# EAGLE board synth_revC (EAGLE 7.5.0), part 1 of 2
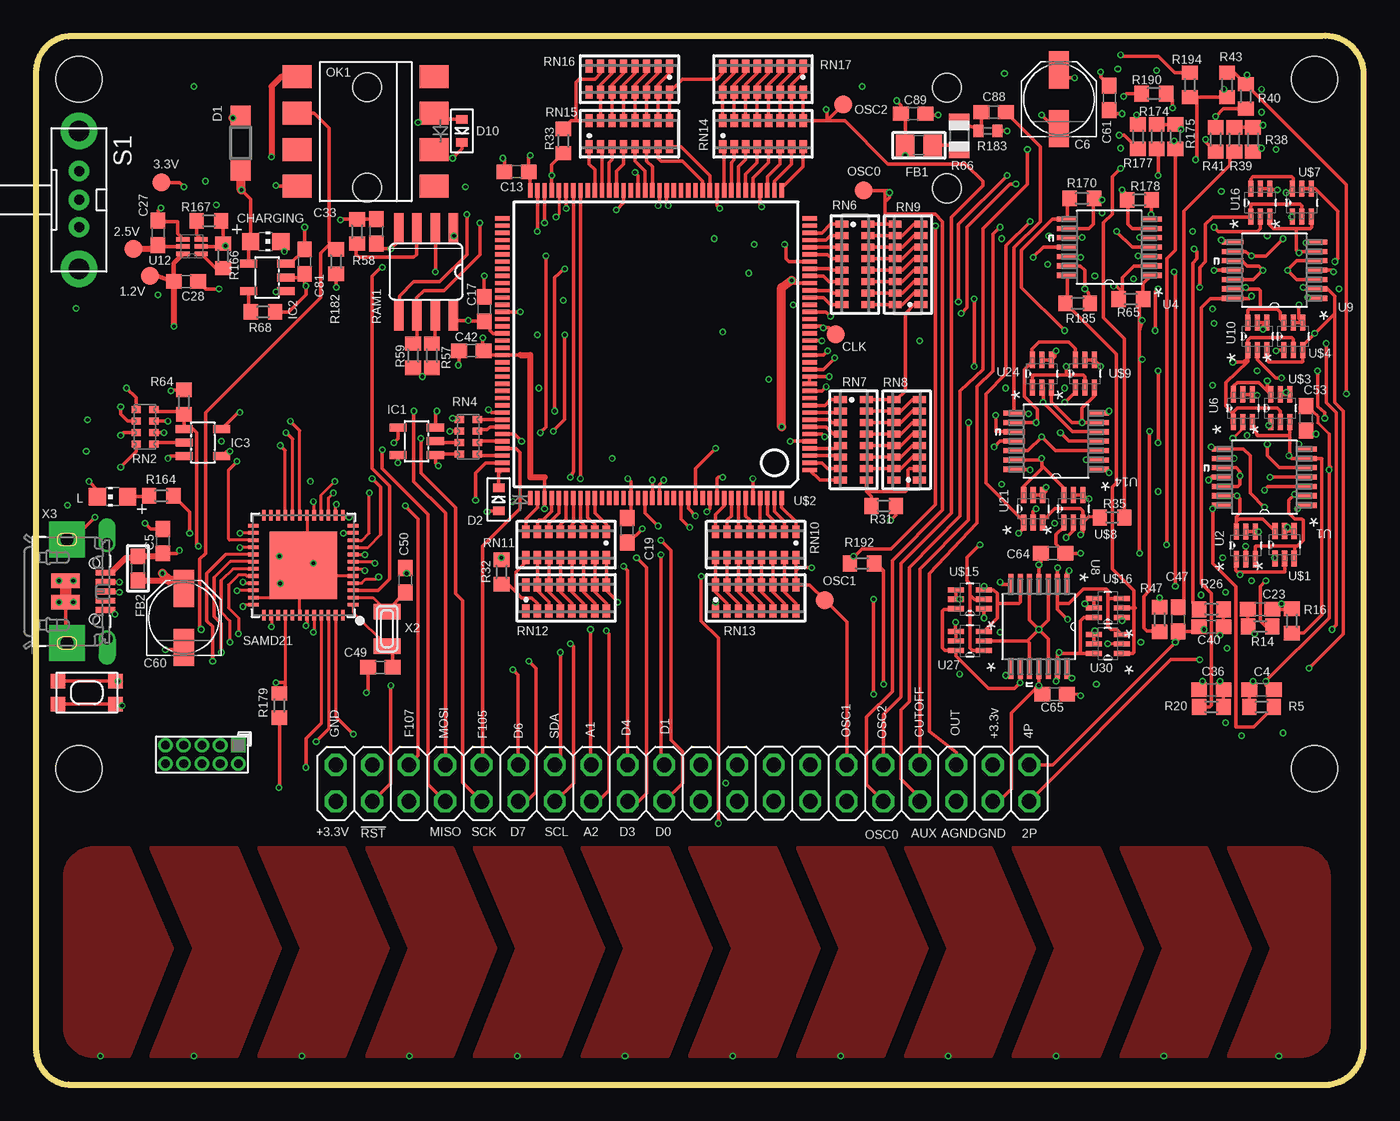
[diagram p0: board, top side]
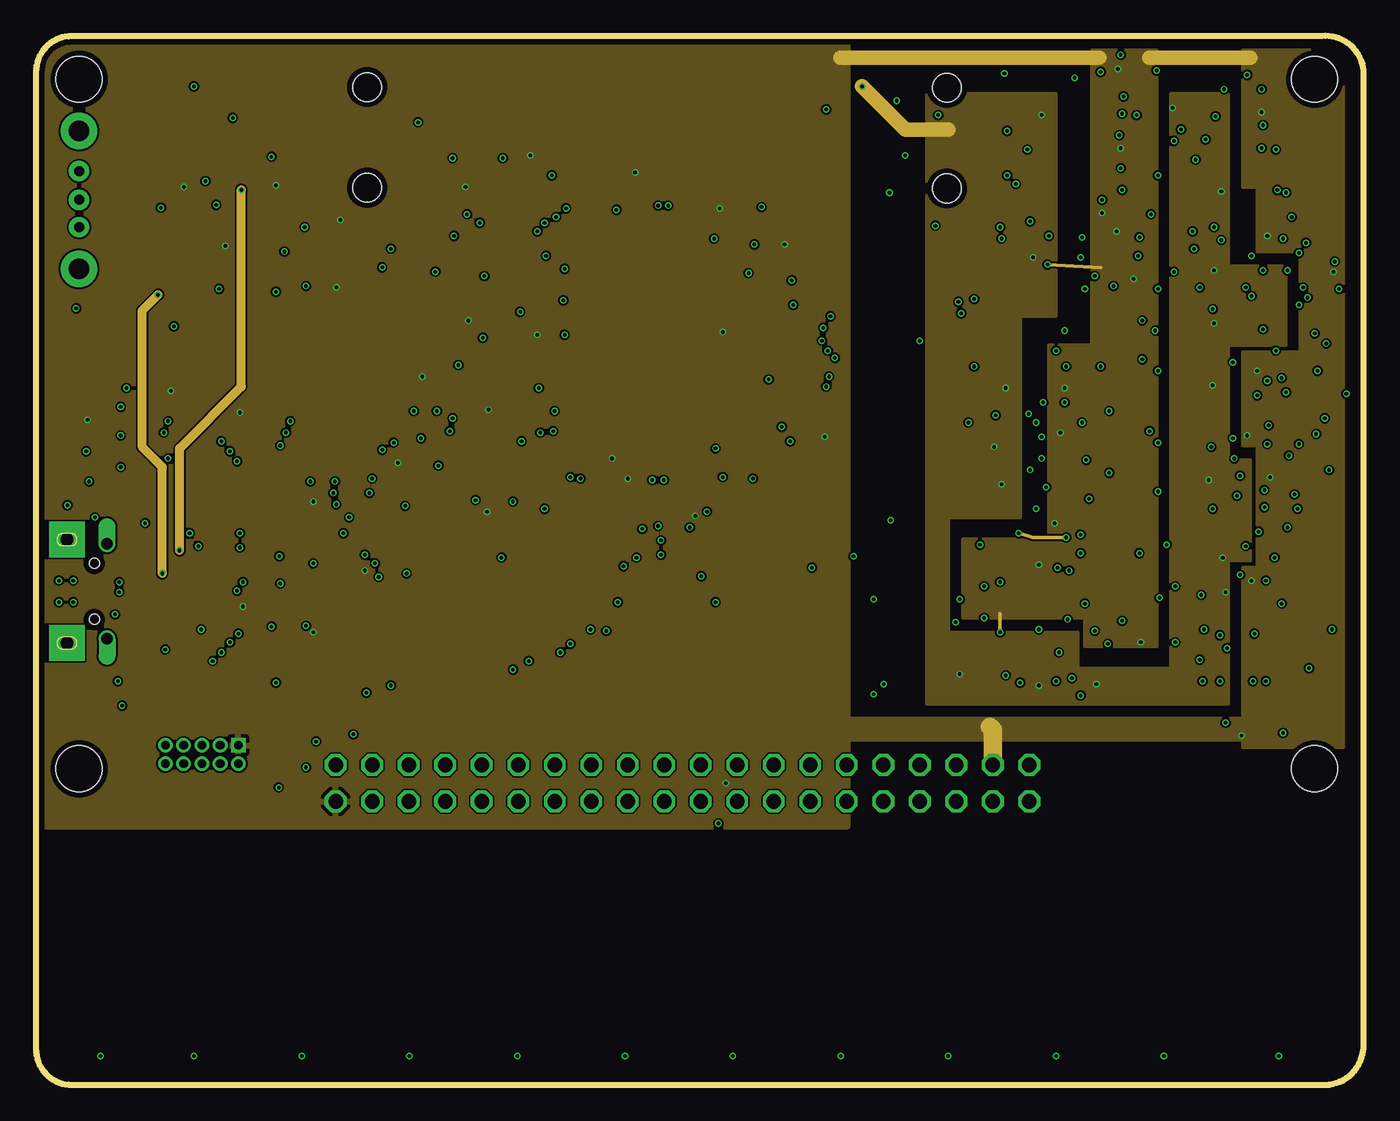
[diagram p1: board, inner layer Route2]
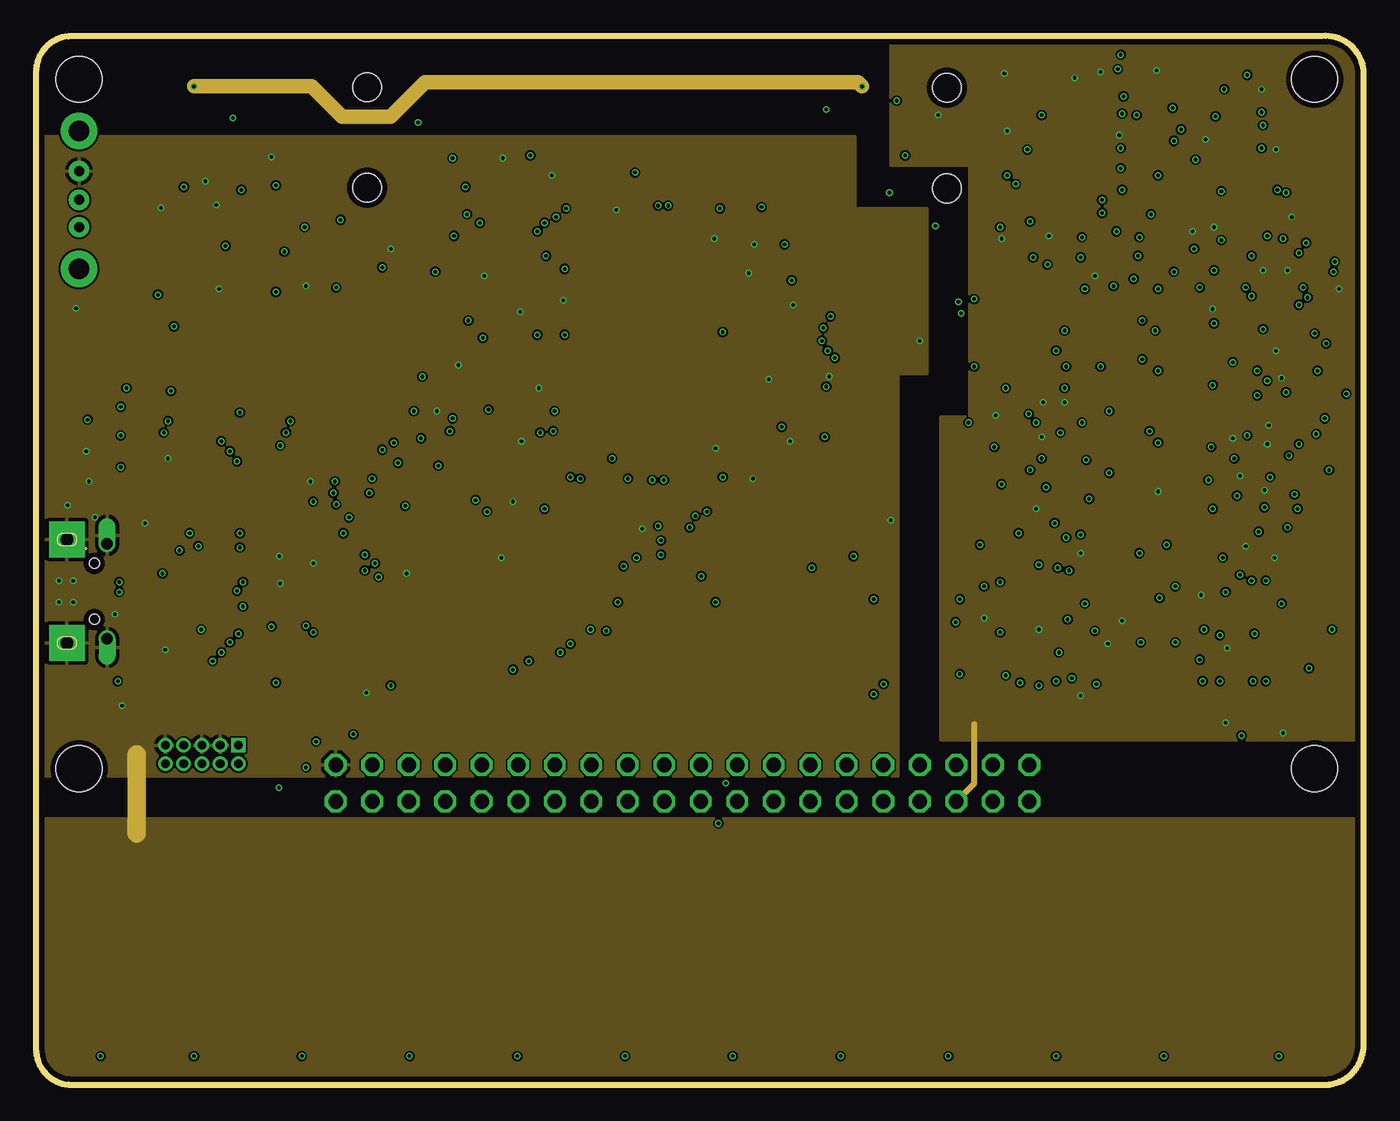
[diagram p2: board, inner layer Route15]
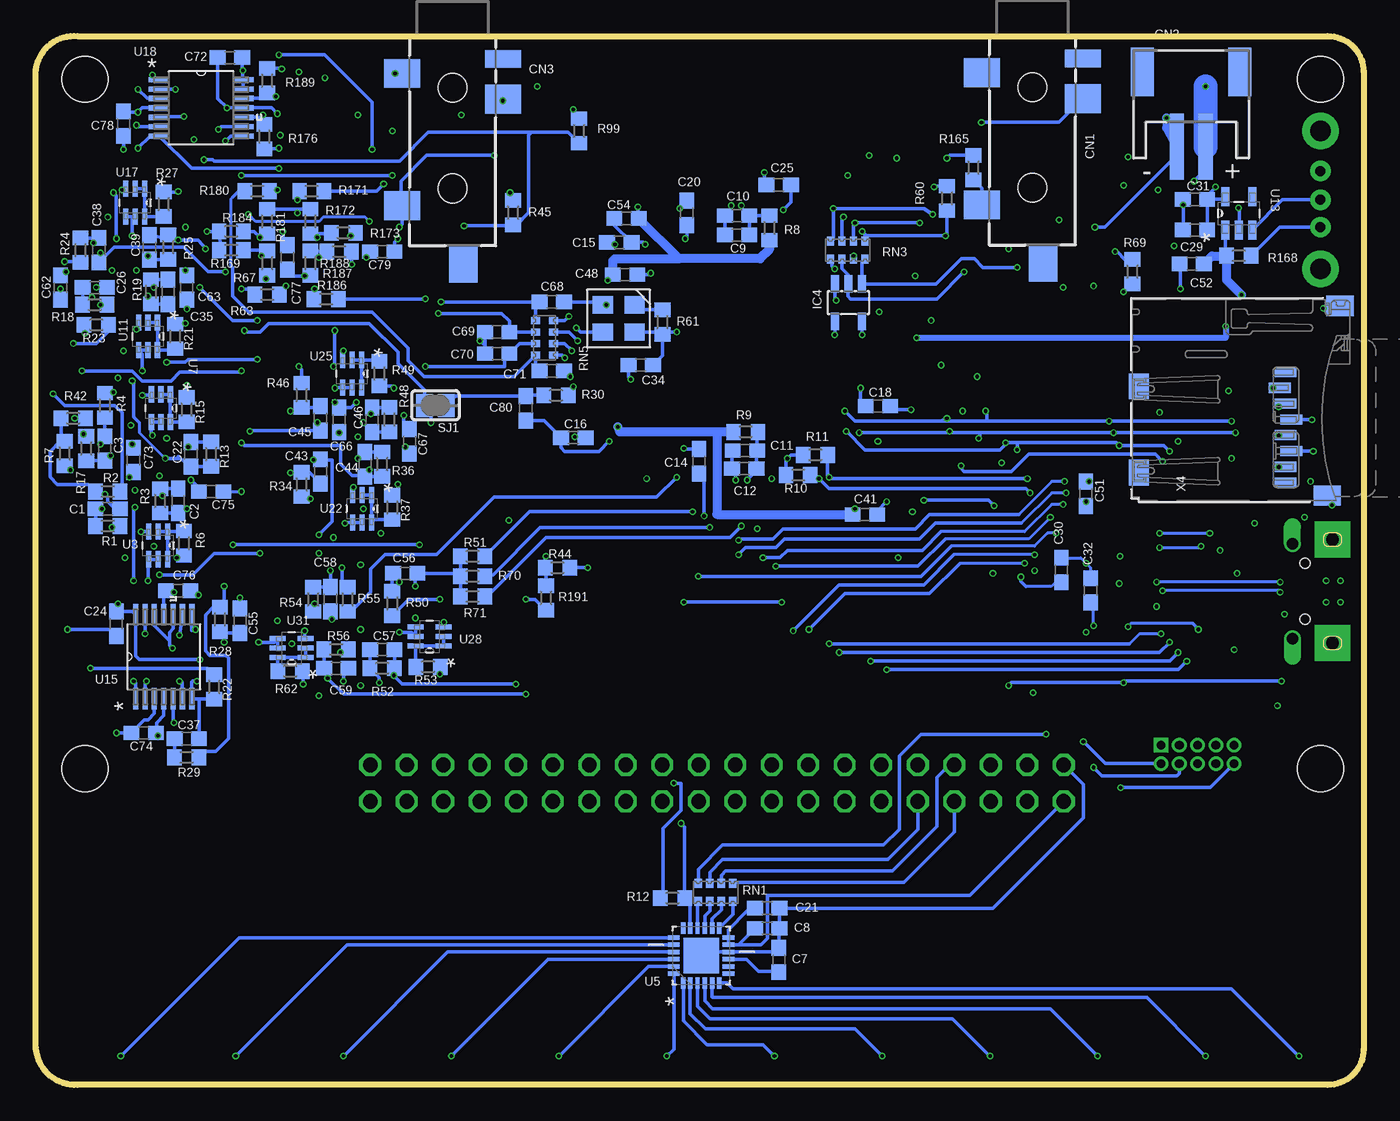
[diagram p3: board, bottom side, seen from below]

Size 92.4 x 73.01 mm. Coordinates in mm from the lower left corner, seen from the top.
Outline: 0,70.5 0,2.5 arc90 2.5,0 89.5,0 arc90 92.4,2.6 92.4,70.6 arc90 89.5,73 2.5,73 arc90 0,70.5
Copper layers (1*2*15*16): Top 0.035559375mm / dielectric 0.17018125mm / Route2 0.01778125mm / dielectric 47mil / Route15 0.01778125mm / dielectric 0.17018125mm / Bottom 0.035559375mm
Design rules "OSHPark-4layer *": minimum track width 5mil, minimum drill 10mil, track to track 5mil, track to pad 5mil, pad to pad 5mil, via to via 5mil, smd to smd 0mil, copper to edge 15mil, drill to drill 6mil, minimum pad ring 4mil, minimum via ring 4mil, stop-mask expansion 0mil, vias tented up to drill 0mil, thermal gap 10mil
Net classes: 3 usbvcc: width 0.102 mm, drill 0.1 mm, clearance 0.15 mm
Holes 3.2 mm at 89,70 3,70 89,22 3,22

## Footprints (pad centres in the part's own frame; a part is rotated, then mirrored left to right if it is on the bottom)
B1,27 = smd 1.27 x 1.27: TP 0,0
C0603 = smd 1.1 x 1: 1 -0.85,0; 2 0.85,0
PANASONIC_C = smd 2.6 x 1.4: + 2.05,0; - -2.05,0
0603-NO = smd 1.1 x 1: 1 -0.85,0; 2 0.85,0
4UCONN_19269 = smd 2 x 2.5: 1 2.5,-3.5; 2 11.7,-3.5; 3 4.3,3.5 | smd 2.5 x 2: 4 15.8,0.75 | smd 1.2 x 2.5: 5 1.5,3.5 | hole 2: 3.5,0; 10.5,0
JST-PH-2-SMT-RA = smd 1 x 4.6: 1 1,-3.7; 2 -1,-3.7 | smd 1.6 x 3.4: NC1 -3.4,1.5; NC2 3.4,1.5
SOD123 = smd 1.4 x 1.4: A 1.9,0; C -1.9,0
SOD-523 = smd 0.8 x 0.6: A 0,-0.8; K 0,0.8
0805 = smd 1.3 x 1.5: 1 -0.95,0; 2 0.95,0
0603 = smd 1.1 x 1: 1 -0.85,0; 2 0.85,0
SOT23-5L = smd 0.55 x 1.2: 1 -0.95,-1.3; 2 0,-1.3; 3 0.95,-1.3; 4 0.95,1.3; 5 -0.95,1.3
PINHEAD_2X05_127 = drill 0.6 pad 1.016 square: 1 -0.635,2.54 | drill 0.6 pad 1.016: 2 0.635,2.54; 3 -0.635,1.27; 4 0.635,1.27; 5 -0.635,0; 6 0.635,0; 7 -0.635,-1.27; 8 0.635,-1.27; 9 -0.635,-2.54; 10 0.635,-2.54
2X20 = drill 1.016 octagon: 1 -24.13,-1.27; 2 -24.13,1.27; 3 -21.59,-1.27; 4 -21.59,1.27; 5 -19.05,-1.27; 6 -19.05,1.27; 7 -16.51,-1.27; 8 -16.51,1.27; 9 -13.97,-1.27; 10 -13.97,1.27; 11 -11.43,-1.27; 12 -11.43,1.27; 13 -8.89,-1.27; 14 -8.89,1.27; 15 -6.35,-1.27; 16 -6.35,1.27; 17 -3.81,-1.27; 18 -3.81,1.27; 19 -1.27,-1.27; 20 -1.27,1.27; 21 1.27,-1.27; 22 1.27,1.27; 23 3.81,-1.27; 24 3.81,1.27; 25 6.35,-1.27; 26 6.35,1.27; 27 8.89,-1.27; 28 8.89,1.27; 29 11.43,-1.27; 30 11.43,1.27; 31 13.97,-1.27; 32 13.97,1.27; 33 16.51,-1.27; 34 16.51,1.27; 35 19.05,-1.27; 36 19.05,1.27; 37 21.59,-1.27; 38 21.59,1.27; 39 24.13,-1.27; 40 24.13,1.27
CHIP-LED0805 = smd 1.2 x 1.2: A 0,-1.05; C 0,1.05
DIL8-SMD = smd 1.6 x 2: 1 -3.81,-4.77; 2 -1.27,-4.77; 3 1.27,-4.77; 4 3.81,-4.77; 5 3.81,4.77; 6 1.27,4.77; 7 -1.27,4.77; 8 -3.81,4.77
R0603 = smd 1 x 1.1: 1 -0.85,0; 2 0.85,0
R0805 = smd 1.1 x 1.4: 1 -1,0; 2 1,0
R0402 = smd 0.7 x 0.9: 1 -0.65,0; 2 0.65,0
SO08 = smd 0.66 x 2.032: 1 -1.905,-3.073; 2 -0.635,-3.073; 3 0.635,-3.073; 4 1.905,-3.073; 5 1.905,3.073; 6 0.635,3.073; 7 -0.635,3.073; 8 -1.905,3.073
0603-ARC = smd 0.5 x 0.65: 1 -1.2,-0.625; 2 -0.4,-0.625; 3 0.4,-0.625; 4 1.2,-0.625; 5 1.2,0.625; 6 0.4,0.625; 7 -0.4,0.625; 8 -1.2,0.625
742-16 = smd 0.5 x 0.9: 1 -2.8,-0.9; 2 -2,-0.9; 3 -1.2,-0.9; 4 -0.4,-0.9; 5 0.4,-0.9; 6 1.2,-0.9; 7 2,-0.9; 8 2.8,-0.9; 9 2.8,0.9; 10 2,0.9; 11 1.2,0.9; 12 0.4,0.9; 13 -0.4,0.9; 14 -1.2,0.9; 15 -2,0.9; 16 -2.8,0.9
EG1213 = drill 0.7 pad 1.422: 1 -2,0; 2 0,0; 3 1.9,0 | drill 1.4 pad 2.54: MT1 -4.8,0; MT2 4.8,0
TQFN48_7MM = smd 0.25 x 0.75: 1 -2.75,-3.475; 2 -2.25,-3.475; 3 -1.75,-3.475; 4 -1.25,-3.475; 5 -0.75,-3.475; 6 -0.25,-3.475; 7 0.25,-3.475; 8 0.75,-3.475; 9 1.25,-3.475; 10 1.75,-3.475; 11 2.25,-3.475; 12 2.75,-3.475; 25 2.75,3.475; 26 2.25,3.475; 27 1.75,3.475; 28 1.25,3.475; 29 0.75,3.475; 30 0.25,3.475; 31 -0.25,3.475; 32 -0.75,3.475; 33 -1.25,3.475; 34 -1.75,3.475; 35 -2.25,3.475; 36 -2.75,3.475 | smd 0.75 x 0.25: 13 3.475,-2.75; 14 3.475,-2.25; 15 3.475,-1.75; 16 3.475,-1.25; 17 3.475,-0.75; 18 3.475,-0.25; 19 3.475,0.25; 20 3.475,0.75; 21 3.475,1.25; 22 3.475,1.75; 23 3.475,2.25; 24 3.475,2.75; 37 -3.475,2.75; 38 -3.475,2.25; 39 -3.475,1.75; 40 -3.475,1.25; 41 -3.475,0.75; 42 -3.475,0.25; 43 -3.475,-0.25; 44 -3.475,-0.75; 45 -3.475,-1.25; 46 -3.475,-1.75; 47 -3.475,-2.25; 48 -3.475,-2.75 | smd 4.7 x 4.7: THERMAL 0,0
SOLDERJUMPER_CLOSEDWIRE = smd 1.168 x 1.6: 1 -0.762,0; 2 0.762,0 | smd 0.635 x 0.203: WIRE 0,0
KMR2 = smd 1 x 1: 1 2,0.8; 2 2,-0.8; 3 -2,0.8; 4 -2,-0.8
SOP65P640X120-14N = smd 1.473 x 0.356: 1 -2.921,1.956; 2 -2.921,1.295; 3 -2.921,0.66; 4 -2.921,0; 5 -2.921,-0.66; 6 -2.921,-1.295; 7 -2.921,-1.956; 8 2.921,-1.956; 9 2.921,-1.295; 10 2.921,-0.66; 11 2.921,0; 12 2.921,0.66; 13 2.921,1.295; 14 2.921,1.956
SOT65P210X110-6N = smd 1.118 x 0.356: 1 -0.965,0.66; 2 -0.965,0; 3 -0.965,-0.66; 4 0.965,-0.66; 5 0.965,0; 6 0.965,0.66
QFN50P400X400X100-25N = smd 0.813 x 0.305: 1 -1.905,1.245; 2 -1.905,0.762; 3 -1.905,0.254; 4 -1.905,-0.254; 5 -1.905,-0.762; 6 -1.905,-1.245; 13 1.905,-1.245; 14 1.905,-0.762; 15 1.905,-0.254; 16 1.905,0.254; 17 1.905,0.762; 18 1.905,1.245 | smd 0.305 x 0.813: 7 -1.245,-1.905; 8 -0.762,-1.905; 9 -0.254,-1.905; 10 0.254,-1.905; 11 0.762,-1.905; 12 1.245,-1.905; 19 1.245,1.905; 20 0.762,1.905; 21 0.254,1.905; 22 -0.254,1.905; 23 -0.762,1.905; 24 -1.245,1.905 | smd 2.489 x 2.489: 25 0,0
SON50P150X150X80-6N = smd 0.914 x 0.305: 1 -0.635,0.508; 2 -0.635,0; 3 -0.635,-0.508; 4 0.635,-0.508; 5 0.635,0; 6 0.635,0.508
SOT95P280X145-5N = smd 1.321 x 0.559: 1 -1.168,0.94; 2 -1.168,0; 3 -1.168,-0.94; 4 1.168,-0.94; 5 1.168,0.94
SOT65P210X100-6N = smd 1.118 x 0.356: 1 -0.965,0.66; 2 -0.965,0; 3 -0.965,-0.66; 4 0.965,-0.66; 5 0.965,0; 6 0.965,0.66
TQ144 = smd 1 x 0.3: 1 -10.7,8.75; 2 -10.7,8.25; 3 -10.7,7.75; 4 -10.7,7.25; 5 -10.7,6.75; 6 -10.7,6.25; 7 -10.7,5.75; 8 -10.7,5.25; 9 -10.7,4.75; 10 -10.7,4.25; 11 -10.7,3.75; 12 -10.7,3.25; 13 -10.7,2.75; 14 -10.7,2.25; 15 -10.7,1.75; 16 -10.7,1.25; 17 -10.7,0.75; 18 -10.7,0.25; 19 -10.7,-0.25; 20 -10.7,-0.75; 21 -10.7,-1.25; 22 -10.7,-1.75; 23 -10.7,-2.25; 24 -10.7,-2.75; 25 -10.7,-3.25; 26 -10.7,-3.75; 27 -10.7,-4.25; 28 -10.7,-4.75; 29 -10.7,-5.25; 30 -10.7,-5.75; 31 -10.7,-6.25; 32 -10.7,-6.75; 33 -10.7,-7.25; 34 -10.7,-7.75; 35 -10.7,-8.25; 36 -10.7,-8.75; 73 10.7,-8.75; 74 10.7,-8.25; 75 10.7,-7.75; 76 10.7,-7.25; 77 10.7,-6.75; 78 10.7,-6.25; 79 10.7,-5.75; 80 10.7,-5.25; 81 10.7,-4.75; 82 10.7,-4.25; 83 10.7,-3.75; 84 10.7,-3.25; 85 10.7,-2.75; 86 10.7,-2.25; 87 10.7,-1.75; 88 10.7,-1.25; 89 10.7,-0.75; 90 10.7,-0.25; 91 10.7,0.25; 92 10.7,0.75; 93 10.7,1.25; 94 10.7,1.75; 95 10.7,2.25; 96 10.7,2.75; 97 10.7,3.25; 98 10.7,3.75; 99 10.7,4.25; 100 10.7,4.75; 101 10.7,5.25; 102 10.7,5.75; 103 10.7,6.25; 104 10.7,6.75; 105 10.7,7.25; 106 10.7,7.75; 107 10.7,8.25; 108 10.7,8.75 | smd 0.3 x 1: 37 -8.75,-10.7; 38 -8.25,-10.7; 39 -7.75,-10.7; 40 -7.25,-10.7; 41 -6.75,-10.7; 42 -6.25,-10.7; 43 -5.75,-10.7; 44 -5.25,-10.7; 45 -4.75,-10.7; 46 -4.25,-10.7; 47 -3.75,-10.7; 48 -3.25,-10.7; 49 -2.75,-10.7; 50 -2.25,-10.7; 51 -1.75,-10.7; 52 -1.25,-10.7; 53 -0.75,-10.7; 54 -0.25,-10.7; 55 0.25,-10.7; 56 0.75,-10.7; 57 1.25,-10.7; 58 1.75,-10.7; 59 2.25,-10.7; 60 2.75,-10.7; 61 3.25,-10.7; 62 3.75,-10.7; 63 4.25,-10.7; 64 4.75,-10.7; 65 5.25,-10.7; 66 5.75,-10.7; 67 6.25,-10.7; 68 6.75,-10.7; 69 7.25,-10.7; 70 7.75,-10.7; 71 8.25,-10.7; 72 8.75,-10.7; 109 8.75,10.7; 110 8.25,10.7; 111 7.75,10.7; 112 7.25,10.7; 113 6.75,10.7; 114 6.25,10.7; 115 5.75,10.7; 116 5.25,10.7; 117 4.75,10.7; 118 4.25,10.7; 119 3.75,10.7; 120 3.25,10.7; 121 2.75,10.7; 122 2.25,10.7; 123 1.75,10.7; 124 1.25,10.7; 125 0.75,10.7; 126 0.25,10.7; 127 -0.25,10.7; 128 -0.75,10.7; 129 -1.25,10.7; 130 -1.75,10.7; 131 -2.25,10.7; 132 -2.75,10.7; 133 -3.25,10.7; 134 -3.75,10.7; 135 -4.25,10.7; 136 -4.75,10.7; 137 -5.25,10.7; 138 -5.75,10.7; 139 -6.25,10.7; 140 -6.75,10.7; 141 -7.25,10.7; 142 -7.75,10.7; 143 -8.25,10.7; 144 -8.75,10.7
SMD-43.2X2.5 = smd 1.4 x 1.2: 1 -1.1,-0.95; 2 1.1,-0.95; 3 1.1,0.95; 4 -1.1,0.95
XTAL3215 = smd 1.1 x 1.9: P$1 1.2,0; P$2 -1.2,0
4UCONN_20329_V2 = smd 1 x 2: BASE@1 -0.75,-2; BASE@2 0.75,-2 | smd 0.4 x 1.35: D+ 0,0.775; D- -0.65,0.775; GND 1.3,0.775; ID 0.65,0.775; VBUS -1.3,0.775 | drill 0.8 pad 1.2 offset: SPRT@1 -3.3,0.9; SPRT@2 3.3,0.9 | drill 0.9 pad 2.5 square: SPRT@3 -3.6,-1.9; SPRT@4 3.6,-1.9 | hole 0.7: -1.95,0; 1.95,0
MICROSD = smd 0.7 x 1.5: 1 9,-10.64; 2 7.9,-10.24; 3 6.8,-10.64; 4 5.7,-11.04; 5 4.6,-10.64; 6 3.5,-11.04; 7 2.4,-10.64; 8 1.3,-10.64 | smd 1.8 x 1.4: CD1 2,-0.44; CD2 8,-0.44 | smd 1.4 x 1.9: MT1 0.4,-13.54; MT2 13.6,-14.44

## Placement (x,y rotation side)
1.2V  TPB1,27  [B1,27]  7.95,56.3 0 top
2.5V  TPB1,27  [B1,27]  6.8,58.2 90 top
3.3V  TPB1,27  [B1,27]  8.75,62.8 90 top
C1  DNI  [C0603]  87.4,40.1 180 bottom
C2  100p  [C0603]  82.5,40.65 270 bottom
C3  DNI  [C0603]  87.6,44.3 90 bottom
C4  1n  [C0603]  85.3,27.5 0 top
C5  10n  [C0603]  8.85,37.85 90 top
C6  100u  [PANASONIC_C]  71.2,68.6 90 top
C7  .1u  [C0603]  40.7,8.7 270 bottom
C8  .1u  [C0603]  41.5,10.9 0 bottom
C9  10u  [C0603]  43.6,59.15 180 bottom
C10  .1u  [C0603]  43.6,60.5 0 bottom
C11  10u  [C0603]  43.05,44.15 180 bottom
C12  .1u  [C0603]  43.1,42.9 0 bottom
C13  .1u  [C0603]  33.45,63.55 0 top
C14  .1u  [C0603]  46.25,43.4 270 bottom
C15  .1u  [C0603]  51.8,58.65 180 bottom
C16  .1u  [C0603]  55,45.05 0 bottom
C17  .1u  [C0603]  31.2,54 270 top
C18  .1u  [C0603]  33.8,47.25 0 bottom
C19  .1u  [C0603]  41.15,38.6 90 top
C20  .1u  [C0603]  47.1,60.7 90 bottom
C21  .1u  [C0603]  41.5,12.3 0 bottom
C22  100p  [C0603]  81.6,43.9 90 bottom
C23  1n  [C0603]  85.2,33.1 0 top
C24  10u  [C0603]  86.8,32.1 90 bottom
C25  .1u  [C0603]  40.7,62.65 180 bottom
C26  DNI  [C0603]  88.3,55.5 180 bottom
C27  1u  [C0603]  8.5,59.31 270 top
C28  1u  [C0603]  10.45,55.92 180 top
C29  10u  [C0603]  11.74,59.5 180 bottom
C30  1u  [C0603]  21.03,35.84 90 bottom
C31  1u  [C0603]  11.74,61.64 180 bottom
C32  1uF  [0603-NO]  18.99,34.42 90 bottom
C33  .1u  [C0603]  23.7,59.4 90 top
C34  .1u  [C0603]  50.3,50.1 0 bottom
C35  100p  [C0603]  83.2,55.2 270 bottom
C36  1n  [C0603]  81.8,27.5 180 top
C37  10u  [C0603]  81.9,24.1 0 bottom
C38  DNI  [C0603]  88,58.1 90 bottom
C39  100p  [C0603]  84.5,58.3 90 bottom
C40  1n  [C0603]  81.8,31.9 180 top
C41  .1u  [C0603]  34.7,39.7 180 bottom
C42  .1u  [C0603]  30.3,51.1 0 top
C43  DNI  [C0603]  72.6,42.7 270 bottom
C44  100p  [C0603]  69.5,43.2 270 bottom
C45  DNI  [C0603]  72.6,46.4 90 bottom
C46  100p  [C0603]  69,46.3 90 bottom
C47  10u  [C0603]  79.5,32.4 90 top
C48  .1u  [C0603]  51.4,56.4 180 bottom
C49  22pF  [0603-NO]  23.98,29.06 180 top
C50  22pF  [0603-NO]  25.71,35.12 90 top
C51  10u  [C0603]  19.33,41.14 90 bottom
C52  10u  [C0603]  11.96,57.15 180 bottom
C53  10u  [C0603]  88.4,46.4 90 top
C54  .1u  [C0603]  51.3,60.3 0 bottom
C55  10u  [C0603]  78.2,32.3 270 bottom
C56  DNI  [C0603]  66.7,35.6 180 bottom
C57  100p  [C0603]  68.3,30.3 0 bottom
C58  DNI  [C0603]  71.9,33.8 90 bottom
C59  100p  [C0603]  71.5,29 180 bottom
C60  100u  [PANASONIC_C]  10.3,32.5 90 top
C61  .1u  [C0603]  74.7,68.7 270 top
C62  .1u  [C0603]  90.7,55.5 270 bottom
C63  .1u  [C0603]  81.9,55.5 90 bottom
C64  .1u  [C0603]  70.8,37 0 top
C65  .1u  [C0603]  70.9,27.2 180 top
C66  .1u  [C0603]  71.3,46.3 90 bottom
C67  .1u  [C0603]  66.4,44.8 270 bottom
C68  1u  [C0603]  56.5,54.5 180 bottom
C69  1u  [C0603]  60.3,52.4 0 bottom
C70  1u  [C0603]  60.3,50.9 0 bottom
C71  1u  [C0603]  56.5,49.7 180 bottom
C72  .1u  [C0603]  78.9,71.5 180 bottom
C73  .1u  [C0603]  85.6,43.5 90 bottom
C74  .1u  [C0603]  84.9,24.5 180 bottom
C75  .1u  [C0603]  80.2,41.3 180 bottom
C76  .1u  [C0603]  82.5,34.4 180 bottom
C77  .1u  [C0603]  74.9,57.6 270 bottom
C78  .1u  [C0603]  86.3,66.9 270 bottom
C79  .1u  [C0603]  68.3,58 180 bottom
C80  1u  [C0603]  58.3,47.1 90 bottom
C81  10u  [C0603]  18.7,57.3 270 top
C88  10u  [C0603]  66.65,67.7 180 top
C89  .1u  [C0603]  61.05,67.6 0 top
CLK  TPB1,27  [B1,27]  55.65,52.25 0 top
CN1  [4UCONN_19269]  23.05,72.95 270 bottom
CN2  [JST-PH-2-SMT-RA]  12,69 0 bottom
CN3  [4UCONN_19269]  63.4,72.9 270 bottom
D1  [SOD123]  14.25,65.55 90 top
D2  CDBU0520  [SOD-523]  32.2,40.75 0 top
D10  [SOD-523]  29.65,66.4 180 top
FB1  BLM21BD102SN1D  [0805]  61.45,65.4 180 top
FB2  [0603]  7.1,35.95 270 top
IC1  74AHC1G125  [SOT23-5L]  26.5,44.8 90 top
IC2  MCP73831/OT  [SOT23-5L]  16.1,56.2 90 top
IC3  74AHC1G125  [SOT23-5L]  11.62,44.71 270 top
IC4  74AHC1G125  [SOT23-5L]  35.85,54.45 180 bottom
J100  PINHEAD-2x5-P1.27  [PINHEAD_2X05_127]  11.55,23 270 top
JP1  [2X20]  45,21 0 top
L  RED  [CHIP-LED0805]  5.33,40.94 90 top
LED1  [CHIP-LED0805]  16,58.7 270 top
OK1  6N137  [DIL8-SMD]  22.95,66.35 90 top
OSC0  TPB1,27  [B1,27]  57.6,62.25 0 top
OSC1  TPB1,27  [B1,27]  54.9,33.75 0 top
OSC2  TPB1,27  [B1,27]  56.2,68.25 0 top
R1  220  [R0603]  87.4,38.9 0 bottom
R2  10k  [R0603]  87.4,41.3 0 bottom
R3  10k  [R0603]  83.75,40.65 90 bottom
R4  220  [R0603]  87.6,47.3 90 bottom
R5  4.7k  [R0603]  85.3,26.3 0 top
R6  10k  [R0603]  82.1,37.7 90 bottom
R7  10k  [R0603]  90.4,43.95 270 bottom
R8  100R  [R0603]  41.35,59.65 270 bottom
R9  100R  [R0603]  43,45.45 180 bottom
R10  10k  [R0603]  39.35,42.45 180 bottom
R11  10k  [R0603]  38.15,43.85 180 bottom
R12  2.2k  [R0603]  48.1,13 0 bottom
R13  10k  [R0603]  80.2,43.9 270 bottom
R14  4.7k  [R0603]  85.2,31.9 0 top
R15  10k  [R0603]  81.9,47 270 bottom
R16  10k  [R0603]  87.4,32.3 90 top
R17  10k  [R0603]  88.9,44.3 270 bottom
R18  220  [R0603]  88.3,54.3 0 bottom
R19  10k  [R0603]  84.4,55.2 90 bottom
R20  4.7k  [R0603]  81.8,26.3 180 top
R21  10k  [R0603]  82.7,52.1 270 bottom
R22  10k  [R0603]  80,27.7 270 bottom
R23  10k  [R0603]  88.2,52.9 180 bottom
R24  220  [R0603]  89.3,58.1 270 bottom
R25  10k  [R0603]  83.2,58.3 270 bottom
R26  4.7k  [R0603]  81.8,33.1 180 top
R27  10k  [R0603]  83.5,61.3 270 bottom
R28  10k  [R0603]  79.6,32.4 270 bottom
R29  10k  [R0603]  81.9,22.8 0 bottom
R30  10k  [R0603]  56.2,48 0 bottom
R31  20k  [R0603]  59,40.3 180 top
R32  20k  [R0603]  32.4,35.7 270 top
R33  20k  [R0603]  36.7,65.7 90 top
R34  220  [R0603]  73.9,41.8 270 bottom
R35  10k  [R0603]  74.9,39.5 0 top
R36  27k  [R0603]  68.3,43.2 90 bottom
R37  10k  [R0603]  67.6,40.2 270 bottom
R38  10k  [R0603]  84.7,65.8 90 top
R39  10k  [R0603]  83.4,65.8 270 top
R40  10k  [R0603]  84.2,68.8 90 top
R41  10k  [R0603]  82.1,65.8 270 top
R42  10k  [R0603]  89.8,46.4 0 bottom
R43  10k  [R0603]  82.9,69.6 270 top
R44  63.5k  [R0603]  56.1,36 0 bottom
R45  63.5k  [R0603]  59.2,60.7 90 bottom
R46  220  [R0603]  73.9,48 90 bottom
R47  10k  [R0603]  78.2,32.4 90 top
R48  63.5k  [R0603]  67.8,46.3 270 bottom
R49  10k  [R0603]  68.5,49.5 90 bottom
R50  220  [R0603]  67.6,33.5 270 bottom
R51  10k  [R0603]  62,36.8 0 bottom
R52  10k  [R0603]  68.3,29 180 bottom
R53  10k  [R0603]  65.1,29.1 180 bottom
R54  220  [R0603]  73.1,33.8 270 bottom
R55  10k  [R0603]  70.7,33.8 270 bottom
R56  10k  [R0603]  71.5,30.3 0 bottom
R57  10k  [R0603]  27.55,50.75 270 top
R58  10k  [R0603]  22.35,59.4 90 top
R59  10k  [R0603]  26.25,50.75 270 top
R60  10k  [R0603]  29,61.7 90 bottom
R61  1k  [R0603]  48.8,53.1 270 bottom
R62  10k  [R0603]  74.7,28.8 180 bottom
R63  180k  [R0603]  76.3,55 180 bottom
R64  10k  [R0603]  10.3,47.52 90 top
R65  10k  [R0603]  76.2,54.7 180 top
R66  100  [R0805]  64.25,66.05 270 top
R67  10k  [R0603]  76.3,57.2 270 bottom
R68  100k  [R0603]  15.8,53.8 0 top
R69  100k  [R0603]  16.1,56.6 270 bottom
R70  10k  [R0603]  62,35.4 0 bottom
R71  10k  [R0603]  62,34 0 bottom
R99  63.5k  [R0603]  54.6,66.4 90 bottom
R164  2.2k  [R0603]  8.73,41 180 top
R165  220  [R0603]  27.15,63.85 270 bottom
R166  10k  [R0603]  13.03,57.7 90 top
R167  10k  [R0603]  12.04,60.14 0 top
R168  100k  [R0603]  8.68,57.71 0 bottom
R169  550  [R0603]  78.8,58.1 180 bottom
R170  10k  [R0603]  72.8,61.7 180 top
R171  180k  [R0603]  73.2,62.2 180 bottom
R172  10k  [R0603]  73.3,60.1 270 bottom
R173  550  [R0603]  71,59.3 180 bottom
R174  180k  [R0603]  78,66 270 top
R175  10k  [R0603]  79.3,66 90 top
R176  10k  [R0603]  76.5,66 270 bottom
R177  550  [R0603]  76.7,66 270 top
R178  10k  [R0603]  76.8,61.6 0 top
R179  330  [R0603]  16.95,26.4 90 top
R180  180k  [R0603]  77,62.2 0 bottom
R181  10k  [R0603]  76.3,60.1 270 bottom
R182  10k  [R0603]  20.9,57.3 90 top
R183  100k  [R0402]  66.25,66.4 180 top
R184  550  [R0603]  78.8,59.4 0 bottom
R185  10k  [R0603]  72.5,54.4 0 top
R186  180k  [R0603]  72.2,54.7 0 bottom
R187  550  [R0603]  73.3,57.2 90 bottom
R188  10k  [R0603]  71.3,58 180 bottom
R189  100k  [R0603]  76.3,69.9 270 bottom
R190  100k  [R0603]  77.8,69 0 top
R191  63.5k  [R0603]  56.9,33.9 270 bottom
R192  63.5k  [R0603]  57.5,36.3 0 top
R194  63.5k  [R0603]  80.3,69.6 90 top
RAM1  N25Q032A13ESC40FTR  [SO08]  27.15,56.6 180 top
RN1  33  [0603-ARC]  45.1,13.4 180 bottom
RN2  33  [0603-ARC]  7.6,45.8 90 top
RN3  33  [0603-ARC]  35.9,58.1 0 bottom
RN4  33  [0603-ARC]  30.1,45.1 90 top
RN5  10k  [0603-ARC]  57,52 90 bottom
RN6  20k  [742-16]  57,57.1 270 top
RN7  20k  [742-16]  56.9,44.9 270 top
RN8  10k  [742-16]  60.6,44.9 90 top
RN9  10k  [742-16]  60.7,57.1 90 top
RN10  20k  [742-16]  50.1,37.6 180 top
RN11  20k  [742-16]  36.9,37.6 180 top
RN12  10k  [742-16]  36.9,33.9 0 top
RN13  10k  [742-16]  50.1,33.9 0 top
RN14  10k  [742-16]  50.6,66.2 0 top
RN15  10k  [742-16]  41.3,66.2 0 top
RN16  10k  [742-16]  41.3,70 180 top
RN17  10k  [742-16]  50.6,70 180 top
S1  EG1213  [EG1213]  3,61.6 270 top
SAMD21  ATSAMD21G18_QFN  [TQFN48_7MM]  18.61,36.17 90 top
SJ1  [SOLDERJUMPER_CLOSEDWIRE]  64.6,47.3 180 bottom
SW1  SPST_TACT-KMR2  [KMR2]  3.54,27.3 0 top
U1  TLV274IPWR  [SOP65P640X120-14N]  85.5,42.3 180 top
U2  DMMT3906W-7-F  [SOT65P210X110-6N]  84.2,37.55 90 top
U3  DMMT3906W-7-F  [SOT65P210X110-6N]  83.9,37.55 270 bottom
U4  TLV274IPWR  [SOP65P640X120-14N]  74.7,58.3 180 top
U5  AD7147ACPZ-1500RL7  [QFN50P400X400X100-25N]  46.1,9 90 bottom
U6  DMMT3906W-7-F  [SOT65P210X110-6N]  84,47.1 90 top
U7  DMMT3906W-7-F  [SOT65P210X110-6N]  83.7,47.1 270 bottom
U8  TLV274IPWR  [SOP65P640X120-14N]  69.8,31.9 270 top
U9  TLV274IPWR  [SOP65P640X120-14N]  86.2,56.7 180 top
U10  DMMT3906W-7-F  [SOT65P210X110-6N]  85,52.1 90 top
U11  DMMT3906W-7-F  [SOT65P210X110-6N]  84.6,52.1 270 bottom
U12  TLV7101828DSER  [SON50P150X150X80-6N]  10.87,58.35 180 top
U13  SPX3819M5-L-3-3  [SOT95P280X145-5N]  8.68,60.67 90 bottom
U14  TLV274IPWR  [SOP65P640X120-14N]  71,44.8 180 top
U15  TLV274IPWR  [SOP65P640X120-14N]  83.5,29.8 90 bottom
U16  DMMT3906W-7-F  [SOT65P210X110-6N]  85.2,61.4 90 top
U17  DMMT3906W-7-F  [SOT65P210X110-6N]  85.5,61.4 270 bottom
U18  TLV274IPWR  [SOP65P640X120-14N]  80.9,68 0 bottom
U21  DMMT3906W-7-F  [SOT65P210X110-6N]  69.4,40.1 90 top
U22  DMMT3906W-7-F  [SOT65P210X110-6N]  69.7,40.1 270 bottom
U24  DMMT3906W-7-F  [SOT65P210X110-6N]  70,49.5 90 top
U25  DMMT3906W-7-F  [SOT65P210X110-6N]  70.4,49.5 270 bottom
U27  DMMT3906W-7-F  [SOT65P210X110-6N]  65,30.9 180 top
U28  DMMT3906W-7-F  [SOT65P210X110-6N]  65,31.2 180 bottom
U30  DMMT3906W-7-F  [SOT65P210X110-6N]  74.6,30.7 180 top
U31  DMMT3906W-7-F  [SOT65P210X110-6N]  74.6,30.4 180 bottom
U$1  DMMT3904W-7-F  [SOT65P210X100-6N]  86.9,37.6 90 top
U$2  ICE40HX4K  [TQ144]  43.15,51.55 180 top
U$3  DMMT3904W-7-F  [SOT65P210X100-6N]  86.6,47.1 90 top
U$4  DMMT3904W-7-F  [SOT65P210X100-6N]  87.5,52.1 90 top
U$5  SIT1602  [SMD-43.2X2.5]  51.85,53.35 180 bottom
U$7  DMMT3904W-7-F  [SOT65P210X100-6N]  88.1,61.4 90 top
U$8  DMMT3904W-7-F  [SOT65P210X100-6N]  72.2,40.1 90 top
U$9  DMMT3904W-7-F  [SOT65P210X100-6N]  73,49.5 90 top
U$15  DMMT3904W-7-F  [SOT65P210X100-6N]  65,33.8 180 top
U$16  DMMT3904W-7-F  [SOT65P210X100-6N]  74.6,33.2 180 top
X2  32.768  [XTAL3215]  24.44,31.74 270 top
X3  microUSB  [4UCONN_20329_V2]  4.06,34.35 270 top
X4  microsd  [MICROSD]  16.07,40.62 90 bottom

## Library data of the parts
1.2V 2.5V 3.3V CLK OSC0 OSC1 OSC2 = testpad
C1-C31 C33-C48 C51-C81 C88 C89 R1-R11 R13-R63 R65 R67 R70 R71 R99 R169-R178 R180 R181 R184-R192 R194 = rcl
C32 C49 C50 CN1 CN3 FB1 FB2 SAMD21 SJ1 X3 X4 = microbuilder
CN2 D2 D10 IC1-IC4 JP1 L LED1 R12 R64 R66 R68 R69 R164-R168 R179 R182 R183 S1 SW1 = adafruit
D1 = diode
J100 = Connettori
OK1 RAM1 U$1-U$5 U$7-U$9 U$15 U$16 = deanParts
RN1-RN5 = resistor-dil; OC_FARNELL: unknown; OC_NEWARK: unknown
RN6-RN17 = resistor-array
U1 U4 U8 U9 U14 U15 U18 = deanParts; MPN: TLV274IPWR; OC_FARNELL: -; OC_NEWARK: 76C8503; PACKAGE: SOIC-14; SUPPLIER: Texas Instruments
U2 U3 U6 U7 U10 U11 U16 U17 U21 U22 U24 U25 U27 U28 U30 U31 = deanParts; MPN: DMMT3906W-7-F; OC_FARNELL: 1773643; OC_NEWARK: 51R6457; PACKAGE: SOT-323-6; SUPPLIER: Diodes Inc
U5 = Analog Devices_By_element14_Batch_1; MPN: AD7147ACPZ-1500RL7; OC_FARNELL: 1838856; OC_NEWARK: 61M4034; PACKAGE: QFN-24; SUPPLIER: Analog Devices
U12 = Texas Instruments_By_element14_Batch_1; MPN: TLV7101828DSER; OC_FARNELL: -; OC_NEWARK: 01T0734; PACKAGE: SON-6; SUPPLIER: Texas Instruments
U13 = Exar_By_element14_Batch_1; MPN: SPX3819M5-L-3-3; OC_FARNELL: 1831949; OC_NEWARK: 23R9702; PACKAGE: SOT-23-5; SUPPLIER: EXAR
X2 = adafruit2

## Nets
2P: C23.2 C24.2 JP1.39 R16.2 U15.14
4P: C40.2 C47.1 C55.2 JP1.40 R28.2 U15.8
!RESET: JP1.3 R179.2 SAMD21.40 SW1.1 SW1.3
$P534: R59.1 RAM1.6 RN3.6 U$2.70
$P789: R60.1 RAM1.1 RN3.5 U$2.71
$P3423: RAM1.5 RN3.8 U$2.67
$P6543: C46.2 C88.1 R48.1 U14.8
$P9999: C52.1 C60.+ FB2.2 R168.1 U13.1
+1.2V: 1.2V.TP C28.2 C41.2 C42.2 C48.2 C54.2 R8.2 R9.2 U12.6 U$2.27 U$2.40 U$2.92 U$2.111
+2.5V: 2.5V.TP C27.2 U12.5
+3.3V: 3.3V.TP C8.1 C13.2 C14.2 C15.2 C16.2 C17.2 C18.2 C19.2 C20.2 C21.1 C25.2 C29.1 C31.1 C33.2 C34.2 C51.1 C62.1 C64.1 C66.1 C73.1 C74.1 C77.1 C78.1 D2.A IC1.5 IC3.5 IC4.5 J100.1 JP1.1 JP1.38 OK1.8 R10.2 R11.2 R12.1 R57.2 R58.2 R59.2 R60.2 R61.2 R64.2 R67.2 R166.2 R167.2 R172.1 R176.2 R181.1 R182.1 R188.1 R189.1 RAM1.8 SAMD21.6 SAMD21.17 SAMD21.36 SAMD21.44 U1.4 U3.4 U3.5 U4.4 U5.11 U5.12 U7.4 U7.5 U8.4 U9.4 U11.4 U11.5 U12.2 U13.5 U14.4 U15.4 U17.4 U17.5 U18.4 U22.4 U22.5 U25.4 U25.5 U28.4 U28.5 U31.4 U31.5 U$2.6 U$2.30 U$2.46 U$2.57 U$2.72 U$2.89 U$2.100 U$2.123 U$2.131 U$5.4 X4.4
A1: JP1.16 SAMD21.7
A2: JP1.15 SAMD21.8
AGND: C6.+ C61.1 C62.2 C63.1 C64.2 C65.1 C66.2 C67.1 C72.1 C73.2 C74.2 C75.1 C76.1 C77.2 C78.2 C79.1 C89.2 CN3.1 JP1.35 R41.2 R169.2 R173.1 R177.2 R183.1 R184.1 R187.1 U1.3 U1.5 U1.10 U1.12 U2.2 U6.2 U8.3 U8.5 U8.10 U8.12 U9.3 U9.5 U9.10 U9.12 U10.2 U14.3 U14.5 U14.10 U14.12 U15.3 U15.5 U15.10 U15.12 U16.2 U18.3 U18.13 U18.14 U21.2 U24.2 U27.2 U30.2 U$1.1 U$3.1 U$4.1 U$7.1 U$8.1 U$9.1 U$15.1 U$16.1
AREF: C30.1 SAMD21.4
AUDIO_OUT: C89.1 CN3.2 CN3.3 FB1.2 JP1.36
AUX: JP1.33 R194.2
BIT0_0: RN7.8 U$2.1
BIT0_1: RN11.8 U$2.110
BIT0_2: RN15.1 U$2.63
BIT1_0: RN7.7 U$2.2
BIT1_1: RN11.7 U$2.112
BIT1_2: RN15.2 U$2.62
BIT2_0: RN7.6 U$2.3
BIT2_1: RN11.6 U$2.113
BIT2_2: RN15.3 U$2.61
BIT3_0: RN7.5 U$2.4
BIT3_1: RN11.5 U$2.114
BIT3_2: RN15.4 U$2.60
BIT4_0: RN7.4 U$2.7
BIT4_1: RN11.4 U$2.115
BIT4_2: RN15.5 U$2.56
BIT5_0: RN7.3 U$2.8
BIT5_1: RN11.3 U$2.116
BIT5_2: RN15.6 U$2.55
BIT6_0: RN7.2 U$2.9
BIT6_1: RN11.2 U$2.117
BIT6_2: RN15.7 U$2.48
BIT7_0: RN7.1 U$2.10
BIT7_1: RN11.1 U$2.118
BIT7_2: RN15.8 U$2.47
BIT8_0: RN6.8 U$2.25
BIT8_1: RN10.8 U$2.136
BIT8_2: RN14.1 U$2.45
BIT9_0: RN6.7 U$2.26
BIT9_1: RN10.7 U$2.137
BIT9_2: RN14.2 U$2.44
BIT10_0: RN6.6 U$2.28
BIT10_1: RN10.6 U$2.138
BIT10_2: RN14.3 U$2.43
BIT11_0: RN6.5 U$2.29
BIT11_1: RN10.5 U$2.139
BIT11_2: RN14.4 U$2.42
BIT12_0: RN6.4 U$2.31
BIT12_1: RN10.4 U$2.141
BIT12_2: RN14.5 U$2.41
BIT13_0: RN6.3 U$2.32
BIT13_1: RN10.3 U$2.142
BIT13_2: RN14.6 U$2.39
BIT14_0: RN6.2 U$2.33
BIT14_1: RN10.2 U$2.143
BIT14_2: RN14.7 U$2.38
BIT15_0: RN6.1 U$2.34
BIT15_1: RN10.1 U$2.144
BIT15_2: RN14.8 U$2.37
CDONE: R10.1 SAMD21.10 U$2.65
CIN0: U5.19
CIN1: U5.20
CIN2: U5.21
CIN3: U5.22
CIN4: U5.23
CIN5: U5.24
CIN6: U5.1
CIN7: U5.2
CIN8: U5.3
CIN9: U5.4
CIN10: U5.5
CIN11: U5.6
CIN12: U5.7
CLK_IN: CLK.TP U$2.21 U$5.3
CRESET: R11.1 SAMD21.9 U$2.66
CT_CS: RN1.4 SAMD21.47
CT_INT: R12.2 SAMD21.11 U5.17
CUTOFF: R65.1 U2.1 U4.1 U6.1 U10.1 U16.1 U$1.2 U$3.2 U$4.2 U$7.2
CUTOFF_AUX: JP1.34 R63.2 SJ1.2
D0: JP1.19 SAMD21.16
D1: JP1.20 SAMD21.15
D2: SAMD21.23
D3: JP1.17 SAMD21.14
D4: JP1.18 SAMD21.13
D6: JP1.12 SAMD21.29
D7: JP1.11 SAMD21.30
D9: SAMD21.12
D13: R164.1 SAMD21.26
D+: SAMD21.34 X3.D+
D-: SAMD21.33 X3.D-
FPGA_105: JP1.10 U$2.105
FPGA_107: JP1.6 U$2.107
FPGA_CS: IC1.1 RN4.8 SAMD21.27
FPGA_MISO: IC1.2 RN4.7
GND: C5.2 C6.- C7.1 C8.2 C13.1 C14.1 C15.1 C16.1 C17.1 C18.1 C19.1 C20.1 C21.2 C25.1 C27.1 C28.1 C29.2 C30.2 C31.2 C32.2 C33.1 C34.1 C41.1 C42.1 C48.1 C49.2 C50.2 C51.2 C52.2 C54.1 C60.- C61.2 C63.2 C65.2 C67.2 C68.1 C69.1 C70.1 C71.1 C72.2 C75.2 C76.2 C79.2 C80.1 C81.2 CN2.1 IC1.3 IC2.2 IC3.3 IC4.3 J100.3 J100.5 J100.9 JP1.2 JP1.37 L.C OK1.5 R6.1 R15.1 R21.1 R27.1 R31.1 R32.1 R33.1 R37.1 R49.1 R53.1 R62.1 R68.2 R190.2 RAM1.4 S1.1 SAMD21.5 SAMD21.18 SAMD21.35 SAMD21.42 SAMD21.THERMAL SW1.2 SW1.4 U1.11 U4.11 U5.10 U5.25 U8.11 U9.11 U12.4 U13.2 U14.11 U15.11 U18.11 U$2.5 U$2.13 U$2.14 U$2.59 U$2.69 U$2.86 U$2.103 U$2.132 U$2.140 U$5.2 X3.BASE@1 X3.BASE@2 X3.GND X3.SPRT@1 X3.SPRT@2 X3.SPRT@3 X3.SPRT@4 X4.6 X4.MT1 X4.MT2
MISO: IC1.4 IC3.4 IC4.4 JP1.7 RN1.1 SAMD21.21
MOSI: JP1.8 RN1.2 RN2.3 RN3.1 RN4.5 SAMD21.19
N$1: R168.2 S1.3
N$2: C1.1 R2.1 R7.1 R42.1 U1.2 U2.3 U$1.3
N$3: C2.1 R3.2 U1.13 U2.6 U$1.6
N$4: CN1.2 R165.2
N$5: R1.2 U$1.4 U$1.5
N$6: C1.2 R1.1 U1.1
N$7: R57.1 RAM1.7
N$8: R58.1 RAM1.3
N$9: R6.2 U3.1 U3.2 U3.6
N$10: R33.2 RN15.16 RN16.7
N$11: R61.1 U$5.1
N$12: IC2.5 R68.1
N$13: U2.4 U2.5 U3.3
N$14: RN4.4 U$2.101
N$15: J100.10 R179.1
N$16: S1.2 U13.3
N$17: SAMD21.24
N$18: C2.2 R3.1 R5.2 U1.14
N$19: C3.1 R16.1 R17.2 U1.6 U6.3 U$3.3
N$20: SAMD21.25
N$21: C22.1 R13.2 U1.9 U6.6 U$3.6
N$22: R4.2 U$3.4 U$3.5
N$23: C4.1 R5.1 U15.2
N$24: C3.2 R4.1 U1.7
N$25: C4.2 C53.2 R7.2 U15.1
N$27: IC2.1 R69.2
N$28: RN14.10 RN17.1 RN17.15
N$29: C9.1 C10.2 R8.1 U$2.54
N$30: C9.2 C10.1 U$2.53
N$31: C11.1 C12.2 R9.1 U$2.126
N$32: C11.2 C12.1 U$2.127
N$33: RN1.6 U5.15
N$34: RN1.5 U5.16
N$35: D2.K U$2.108
N$36: RN2.8 X4.7
N$37: R32.2 RN11.9 RN12.2
N$38: RN15.15 RN16.6 RN16.10
N$39: RN15.14 RN16.5 RN16.11
N$40: RN15.13 RN16.4 RN16.12
N$41: RN5.4 U$2.23
N$42: C7.2 U5.9
N$43: RN2.7 X4.5
N$44: RN1.8 U5.13
N$45: RN2.6 X4.3
N$46: RN1.7 U5.14
N$47: RN2.5 X4.2
N$48: RN3.7 U$2.68
N$49: R15.2 U7.1 U7.2 U7.6
N$50: U6.4 U6.5 U7.3
N$51: C22.2 R13.1 R14.2 U1.8
N$52: C23.1 R14.1 U15.13
N$53: LED1.C R69.1
N$54: C53.1 R17.1
N$55: RN15.12 RN16.3 RN16.13
N$56: RN5.3 U$2.19
N$57: C26.1 R22.1 R23.2 U9.2 U10.3 U$4.3
N$58: C35.1 R19.2 U9.13 U10.6 U$4.6
N$59: R18.2 U$4.4 U$4.5
N$60: C26.2 R18.1 U9.1
N$61: R21.2 U11.1 U11.2 U11.6
N$62: U10.4 U10.5 U11.3
N$63: C35.2 R19.1 R20.2 U9.14
N$64: C36.1 R20.1 U15.6
N$65: C36.2 C37.2 R22.2 U15.7
N$66: C24.1 R23.1
N$67: C38.1 R28.1 R29.2 U9.6 U16.3 U$7.3
N$68: RN15.11 RN16.2 RN16.14
N$69: C39.1 R25.2 U9.9 U16.6 U$7.6
N$70: R24.2 U$7.4 U$7.5
N$71: C38.2 R24.1 U9.7
N$72: R27.2 U17.1 U17.2 U17.6
N$73: RN15.10 RN16.1 RN16.15
N$74: U16.4 U16.5 U17.3
N$75: C39.2 R25.1 R26.2 U9.8
N$76: C40.1 R26.1 U15.9
N$77: RN4.3 U$2.102
N$78: C37.1 R29.1
N$79: RN15.9 RN16.16 RN17.8
N$80: RN14.16 RN17.7 RN17.9
N$81: RN4.2 U$2.104
N$82: RN4.1 U$2.106
N$83: RN14.15 RN17.6 RN17.10
N$84: RN14.14 RN17.5 RN17.11
N$85: RN14.13 RN17.4 RN17.12
N$86: RN14.12 RN17.3 RN17.13
N$87: RN14.11 RN17.2 RN17.14
N$88: RN11.10 RN12.3 RN12.15
N$89: RN10.15 RN13.8 RN13.10
N$90: RN10.14 RN13.7 RN13.11
N$91: RN10.13 RN13.6 RN13.12
N$92: RN10.12 RN13.5 RN13.13
N$93: RN10.11 RN13.4 RN13.14
N$94: RN10.10 RN13.3 RN13.15
N$95: RN10.9 RN13.2 RN13.16
N$96: RN11.16 RN12.9 RN13.1
N$97: RN11.15 RN12.8 RN12.10
N$98: RN11.14 RN12.7 RN12.11
N$99: RN11.13 RN12.6 RN12.12
N$100: RN11.12 RN12.5 RN12.13
N$101: RN11.11 RN12.4 RN12.14
N$102: R31.2 RN7.9 RN8.2
N$103: RN7.10 RN8.3 RN8.15
N$104: RN6.15 RN9.8 RN9.10
N$105: RN6.14 RN9.7 RN9.11
N$106: RN6.13 RN9.6 RN9.12
N$107: RN6.12 RN9.5 RN9.13
N$108: RN6.11 RN9.4 RN9.14
N$109: RN6.10 RN9.3 RN9.15
N$110: RN6.9 RN9.2 RN9.16
N$111: RN7.16 RN8.9 RN9.1
N$112: RN7.15 RN8.8 RN8.10
N$113: RN7.14 RN8.7 RN8.11
N$114: RN7.13 RN8.6 RN8.12
N$115: RN7.12 RN8.5 RN8.13
N$116: RN7.11 RN8.4 RN8.14
N$117: L.A R164.2
N$118: R166.1 U12.1
N$119: R167.1 U12.3
N$121: C49.1 SAMD21.1 X2.P$1
N$122: C50.1 SAMD21.2 X2.P$2
N$123: RN5.2 U$2.17
N$124: RN5.1 U$2.15
N$126: D10.K OK1.2 R165.1
N$127: R30.2 U$2.12
N$136: C56.1 R51.1 R70.1 R71.1 U8.6 U27.3 U$15.3
N$137: C43.1 R35.1 U14.2 U21.3 U$8.3
N$138: R67.1 R169.1 U4.3
N$139: R34.2 U$8.4 U$8.5
N$140: C43.2 R34.1 U14.1
N$141: R37.2 U22.1 U22.2 U22.6
N$143: U21.4 U21.5 U22.3
N$144: C45.1 R47.1 U14.6 U24.3 U$9.3
N$145: R40.1 R41.1 U18.5
N$146: R35.2 R38.1 U18.7
N$147: R38.2 R39.1 U18.6
N$148: C46.1 R48.2 U14.9 U24.6 U$9.6
N$149: C47.2 R39.2
N$150: R46.2 U$9.4 U$9.5
N$153: R43.2 R44.1 R45.1 R99.1 R191.1 R192.1 R194.1 U18.2
N$154: C45.2 R46.1 U14.7
N$156: CN1.3 D10.A OK1.3
N$158: FB1.1 R66.2
N$159: C88.2 R66.1 R183.2
N$161: R49.2 U25.1 U25.2 U25.6
N$162: JP1.27
N$163: U24.4 U24.5 U25.3
N$164: C55.1 R47.2
N$167: C57.1 R52.2 U8.9 U27.6 U$15.6
N$168: R50.2 U$15.4 U$15.5
N$169: C56.2 R50.1 U8.7
N$170: R53.2 U28.1 U28.2 U28.6
N$171: JP1.25
N$172: U27.4 U27.5 U28.3
N$173: C58.1 R55.1 U8.2 U30.3 U$16.3
N$174: C59.1 R56.2 U8.13 U30.6 U$16.6
N$175: R54.2 U$16.4 U$16.5
N$176: C58.2 R54.1 U8.1
N$177: R62.2 U31.1 U31.2 U31.6
N$179: U30.4 U30.5 U31.3
N$180: C44.1 R36.2 U14.13 U21.6 U$8.6
N$181: R63.1 R65.2 U4.2
N$182: R176.1 R177.1 U18.10
N$183: R170.1 R171.2 U4.9
N$184: R174.1 R175.2 U18.9
N$185: R172.2 R173.2 U4.10
N$187: R185.2 R186.1 U4.13
N$189: R187.2 R188.2 U4.12
N$191: R181.2 R184.2 U4.5
N$192: R178.1 R180.2 U4.6
N$194: R189.2 R190.1 U18.12
N$204: JP1.5
N$211: JP1.28
N$212: JP1.26
N$223: JP1.4
NOISE: R185.1 U4.14 U30.1 U$16.2
NOISE_IN: R55.2 U$2.135
NOISE_SCALED: C59.2 R56.1 R191.2 U8.14
OSC_0: JP1.31 OSC0.TP R45.2 RN6.16 RN9.9
OSC_1: JP1.30 OSC1.TP R44.2 RN10.16 RN13.9
OSC_2: JP1.32 OSC2.TP R99.2 RN14.9 RN17.16
PWM_CUTOFF: C80.2 R30.1 SJ1.1
PWM_NOISE: C70.2 R186.2 RN5.7
PWM_RESO: C71.2 R180.1 RN5.8
PWM_SUB: C68.2 R174.2 RN5.5
PWM_VCA: C69.2 R171.1 RN5.6
RES_OUT: C44.2 R36.1 R42.2 U14.14
RESO: R178.2 U4.7 U21.1 U$8.2
RXD: OK1.6 R182.2 SAMD21.38
RXLED: SAMD21.48
SCK: JP1.9 RN1.3 RN2.2 RN3.3 RN4.6 SAMD21.20
SCL: JP1.13 SAMD21.32
SD_CS: IC3.1 R64.1 RN2.4 SAMD21.28
SD_MISO: IC3.2 RN2.1
SDA: JP1.14 SAMD21.31
SPI_SDI: IC4.2 RAM1.2 RN3.2
SPI_SS_B: IC4.1 RN3.4 SAMD21.3
SUB: R175.1 U18.8 U27.1 U$15.2
SUB0: R71.2 U$2.125
SUB1: R70.2 U$2.130
SUB2: R51.2 U$2.134
SUB_SCALED: C57.2 R52.1 R192.2 U8.8
SWCLK: J100.4 SAMD21.45
SWDIO: J100.2 SAMD21.46
TXD: SAMD21.37
VBAT: C81.1 CN2.2 D1.A IC2.3
VBUS: C5.1 D1.C FB2.1 IC2.4 LED1.A X3.VBUS
VCA: R170.2 U4.8 U24.1 U$9.2
VDDCORE1: C32.1 SAMD21.43
VSUM: R2.2 R40.2 R43.1 U18.1